# Altium PCB ArduinoUno_Motor_Shield.PcbDoc
Units mm, origin at the board's own origin, x right, y up, seen from the top; angles counter-clockwise.
Board outline 68.58 x 53.34 mm, 2 copper layers (Top Layer, Bottom Layer); 16 components, 38 nets, 79 pads, 0 vias.
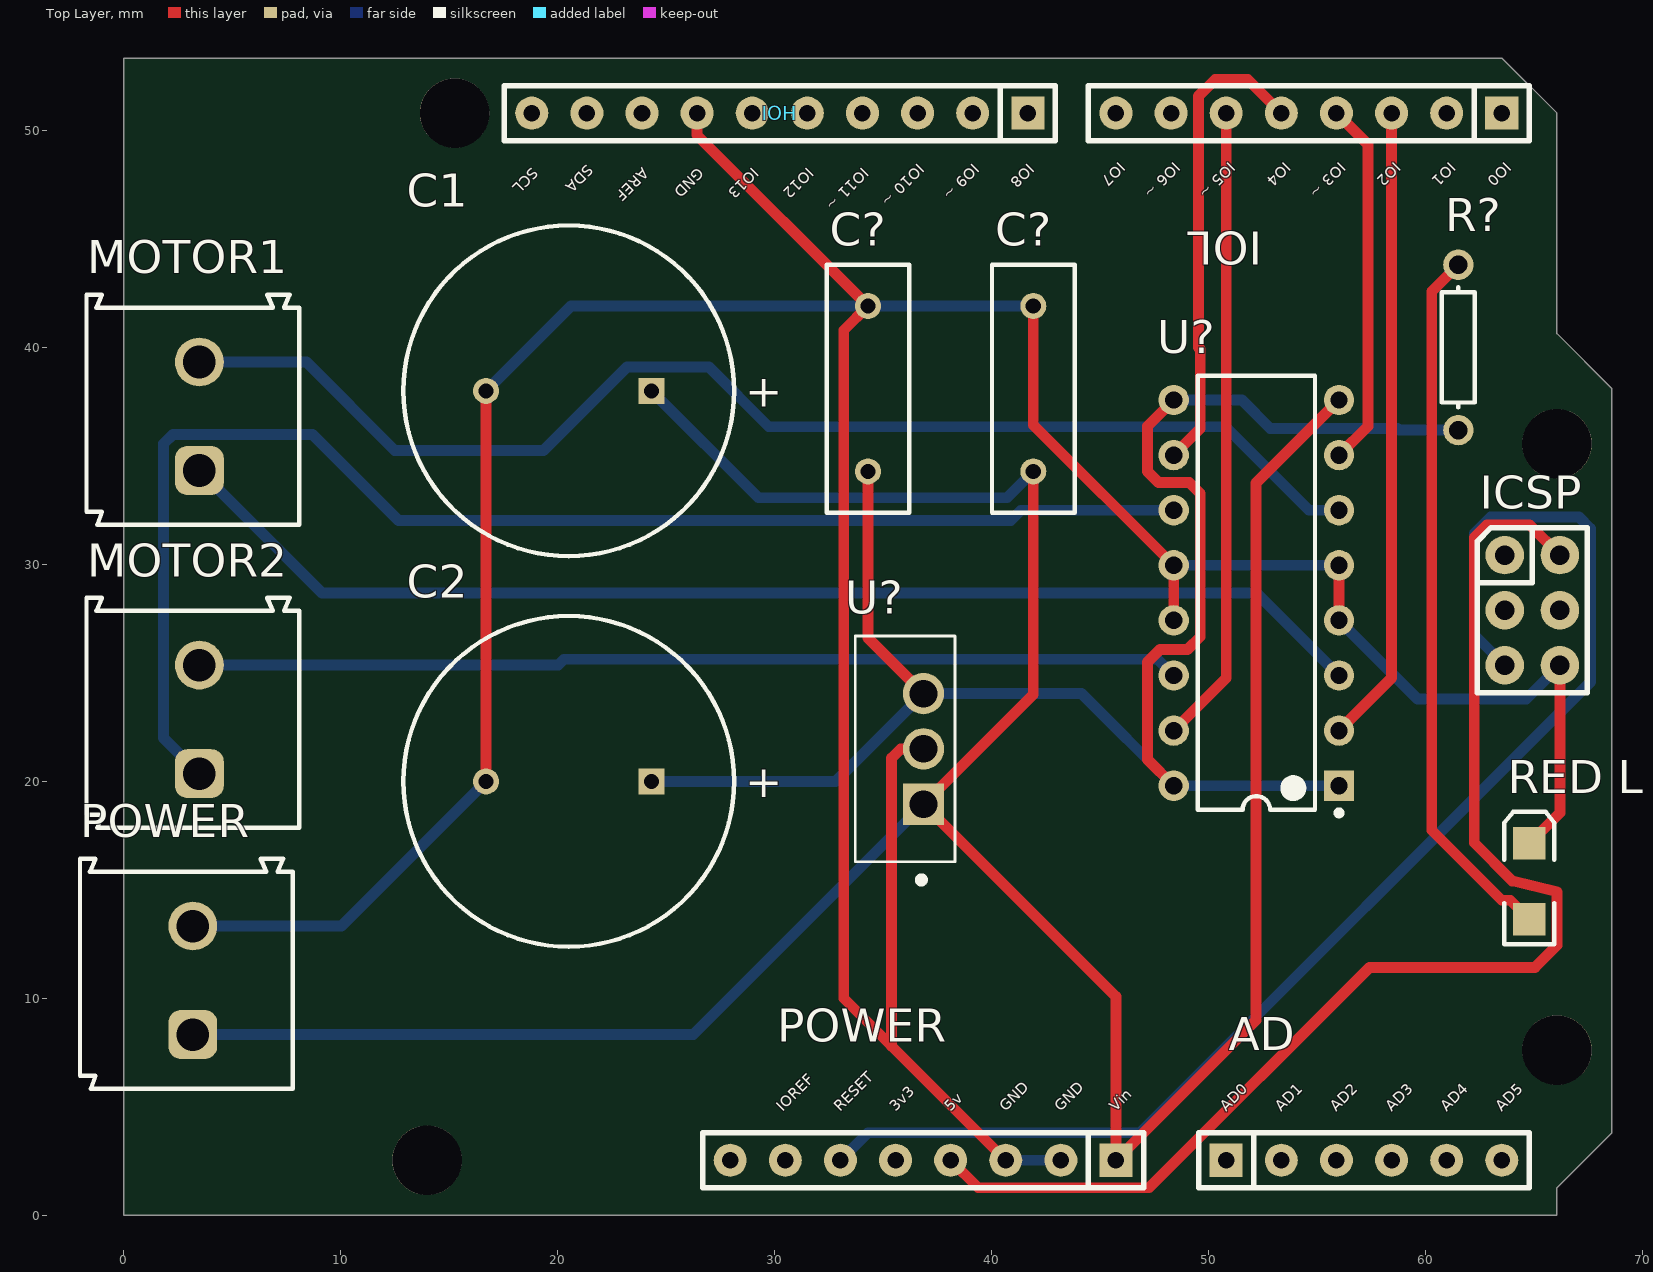
[diagram p0: Top Layer view]
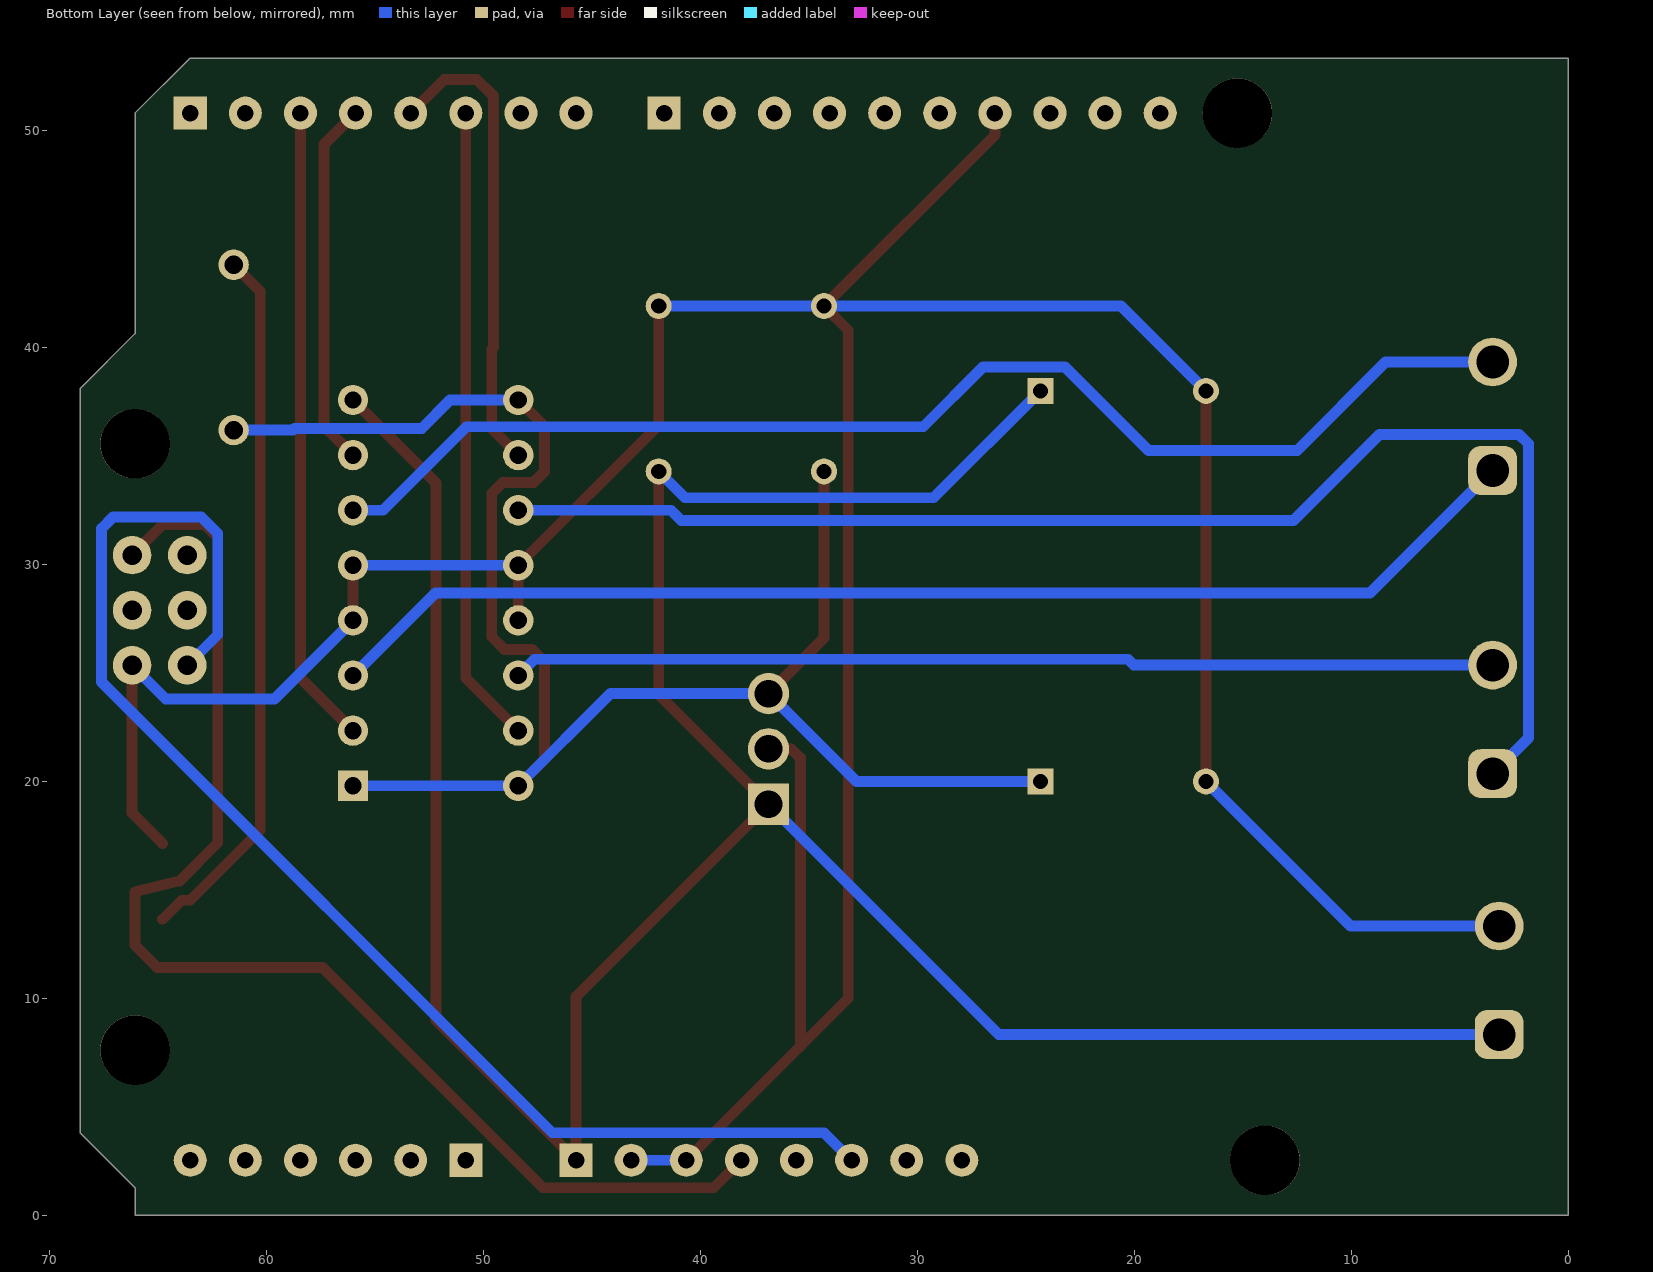
[diagram p1: Bottom Layer view, seen from below]
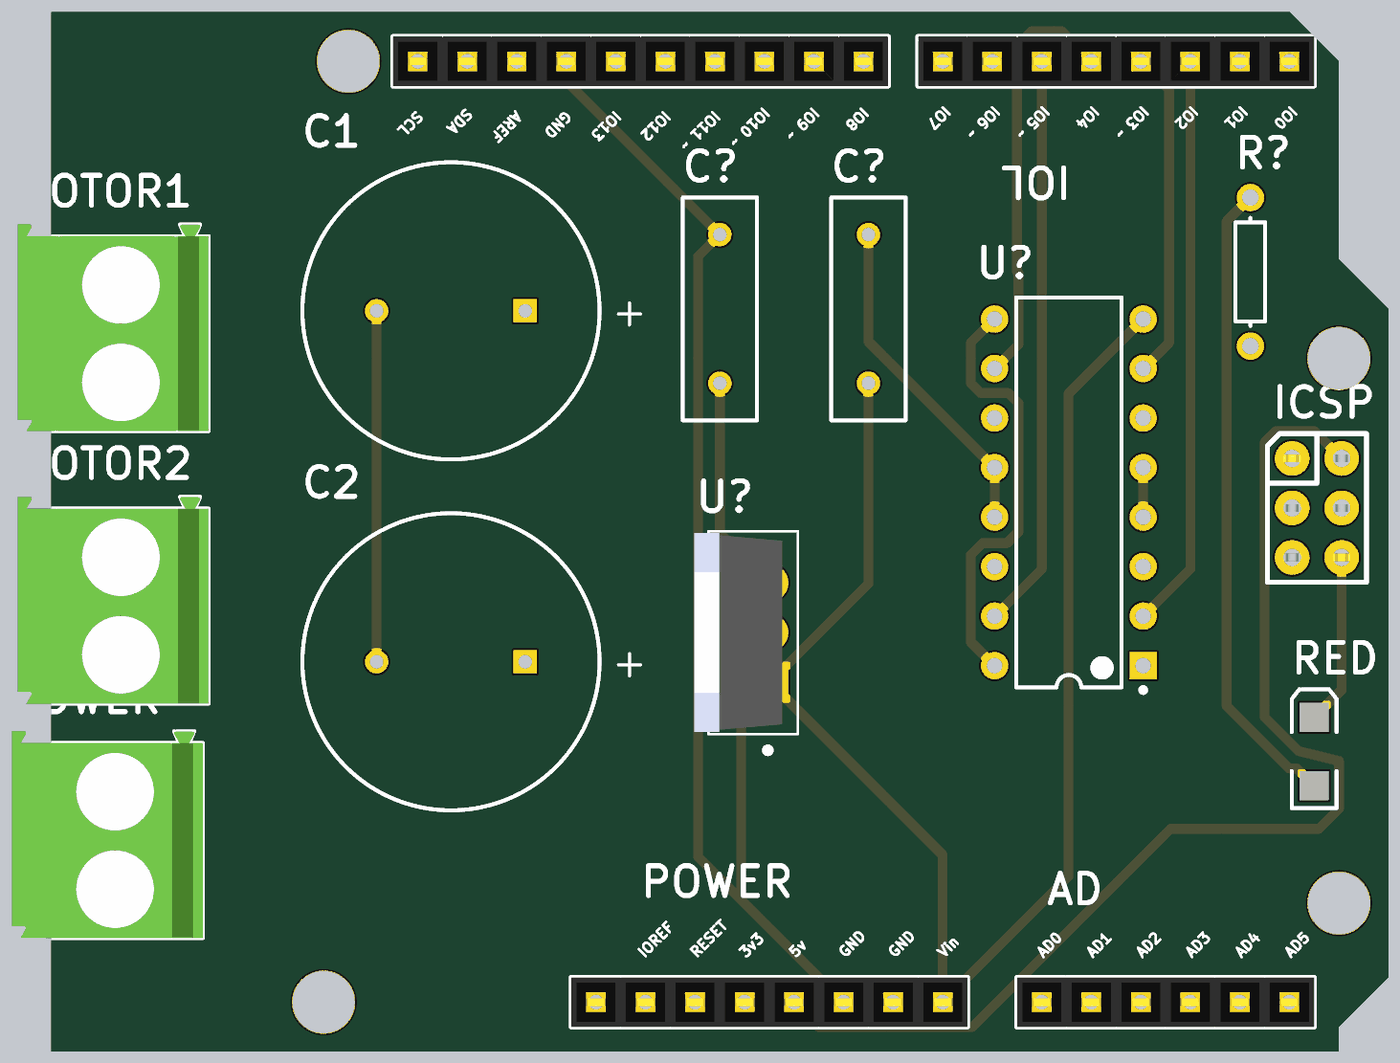
[diagram p2: 3D render of the assembled board from above, using the file's embedded part models]

## Layer stack, top to bottom
Top Solder: solder mask 0.0102, Solder Resist, Dk 3.5
Top Layer: signal copper 0.0356
Dielectric1: dielectric 0.32, FR-4, Dk 4.8
Bottom Layer: signal copper 0.0356
Bottom Solder: solder mask 0.0102, Solder Resist, Dk 3.5

## Board outline
0,0 0,53.34 63.5,53.34 66.04,50.8 66.04,40.64 68.58,38.1 68.58,3.81 66.04,1.27 66.04,0

## Design rules (kind name [scope] priority, off if disabled: settings)
Clearance [All] p1: gap=0.254 ignorepadtopadclearanceinfootprint=FALSE
PolygonConnect [All] p1: connectstyle=Relief reliefconductorwidth=0.254 reliefentries=4 polygonreliefangle="90 Angle" airgapwidth=0.254
RoutingVias [All] p1: holewidth=0.711 width=1.27 viastyle="Through Hole" minholewidth=0.711 minwidth=1.27 maxholewidth=0.711 maxwidth=1.27
SilkToSolderMaskClearance SilkscreenOverComponentPads [IsPad] p1: minsilkscreentomaskgap=0.254 clearancetoexposedcopper=TRUE
SolderMaskExpansion [All] p1: expansion=0.102 istentingtop=FALSE
SupplyNets "Schematic Supply Nets" [InNet('GND')] p1: voltage=0.000
Width [All] p1: maxlimit=10 minlimit=0.254 preferedwidth=0.5 minimp=50.000000 maximp=50.000000 favimp=50.000000
29 further rules are at their usual default settings.

## Classes and differential pairs
component class ArduinoUno_Motor_Shield: AD C1 C2 C? ICSP IOH IOL MOTOR1 MOTOR2 POWER R? "RED LED" U?

## Components (designator, comment, footprint, x,y, rotation, side; value= is the part's Value field where it differs from the comment)
AD "AD" "Header 6x1 8.5mm" 50.8,2.54 r0 top locked
C1 "" RB7.6-15 20.5,38 r0 top value=47uF
C2 "" RB7.6-15 20.5,20 r0 top value=47uF
C? "Cap" RAD-0.3 41.91,38.1 r90 top value=100nF
C? "Cap" RAD-0.3 34.29,38.1 r90 top value=100nF
ICSP "ICSP" ICSP 63.64,30.43 r0 top locked
IOH "IOH" "Header 10x1 8.5mm" 41.656,50.8 r180 top locked
IOL "IOL" "Header 8x1 8.5mm" 63.5,50.8 r180 top locked
MOTOR1 "691216710002" 691216710002 3.175,36.83 r90 top locked
MOTOR2 "691216710002" 691216710002 3.175,22.86 r90 top locked
POWER "691216710002" 691216710002 2.875,10.835 r90 top locked
POWER "POWER_UNO" "Header 8x1 8.5mm" 45.72,2.54 r180 top locked
R? "Res1" AXIAL-0.3 61.5,40 r90 top value=220
"RED LED" "LED2" 3.2X1.6X1.1 64.77,15.395 r90 top
U? "L293D" STM-L293D-16 52.19,28.69 r180 top
U? "L7805CV-DG" TO255P1040X460X2890-3 36,21.5 r90 top

## Footprints (in the part's own frame and the unit in brackets; to place one, negate y for a bottom-side part, rotate by r counter-clockwise, add the part's x,y. Pads: shape width x height; smd on the part's side, far side on the other; paste and mask are expansions set on the pad)
3.2X1.6X1.1 [mm] "SMT LED; 2 Flat Leads"
  rect 1.5x1.5 smd: 1(-1.75,0) 2(1.75,0)
  silkscreen extent -2.9,-1.15 3.2,1.15
691216710002 [mm] "Serie 2167 - 5.00 mm _ 2 pins"
  rrect50% 2.25x2.25 hole 1.5: 1(-2.5,-0.3)
  round 2.25 hole 1.5: 2(2.5,-0.3)
  silkscreen extent -5,-4.9 5.6,4.9, body extent -5,-4.9 5.6,4.9, height 13.85
AXIAL-0.3 [mm] "Axial Device, Thru-Hole; 2 Leads; 0.3 in Pin Spacing"
  round 1.4 hole 0.85: 1(-3.81,0) 2(3.81,0)
  silkscreen extent -2.77,-0.76 2.77,0.76
"Header 6x1 8.5mm" [mil] "Stackable 6 pin header"
  rect 60x60 hole 30: 1(0,0)
  round 60 hole 30: 2(100,0) 3(200,0) 4(300,0) 5(400,0) 6(500,0)
  silkscreen extent -50,-50 550,50, body extent -50,-50 550,50, height 335
"Header 8x1 8.5mm" [mil] "Stackable 8 pin header"
  rect 60x60 hole 30: 1(0,0)
  round 60 hole 30: 2(100,0) 3(200,0) 4(300,0) 5(400,0) 6(500,0) 7(600,0) 8(700,0)
  silkscreen extent -50,-50 750,50, body extent -50,-50 750,50, height 335
"Header 10x1 8.5mm" [mil] "Stackable 10 pin header"
  rect 60x60 hole 30: 1(0,0)
  round 60 hole 30: 2(100,0) 3(200,0) 4(300,0) 5(400,0) 6(500,0) 7(600,0) 8(700,0) 9(800,0) 10(900,0)
  silkscreen extent -50,-50 950,50, body extent -50,-50 950,50, height 335
ICSP [mil]
  round 70 hole 35.43: 1(0,0) 2(100,0) 3(0,-100) 4(100,-100) 5(0,-200) 6(100,-200)
  silkscreen extent -50,-250 150,50, body extent -50,-250 150,50, height 485
RAD-0.3 [mm] "Radial Cap, Thru-Hole; 2 Leads; 0.3 in Pin Spacing"
  round 1.2 hole 0.7: 1(-3.81,0) 2(3.81,0)
  silkscreen extent -5.71,-1.91 5.71,1.91
RB7.6-15 [mm] "Polarized Capacitor (Radial); 2 Leads"
  rect 1.2x1.2 hole 0.7: 1(3.81,0)
  round 1.2 hole 0.7: 2(-3.81,0)
  silkscreen extent -7.62,-7.62 7.62,7.62
STM-L293D-16 [mm] "DIP, 16-Leads, Body 20x6.85mm, Pitch 2.54mm"
  rect 1.4x1.4 hole 0.8: 1(-3.81,8.89)
  round 1.4 hole 0.8: 2(-3.81,6.35) 3(-3.81,3.81) 4(-3.81,1.27) 5(-3.81,-1.27) 6(-3.81,-3.81) 7(-3.81,-6.35) 8(-3.81,-8.89) 9(3.81,-8.89) 10(3.81,-6.35) 11(3.81,-3.81) 12(3.81,-1.27) 13(3.81,1.27) 14(3.81,3.81) 15(3.81,6.35) 16(3.81,8.89)
  silkscreen extent -3.94,-10 2.7,10.26, body extent -3.93,-10 3.93,10, height 5.1
TO255P1040X460X2890-3 [mm]
  rect 1.91x1.91 / inner round 1.91 / far side rect 1.91x1.91 hole 1.27: 1(-2.55,-0.85)
  round 1.91 hole 1.27: 2(0,-0.85) 3(2.55,-0.85)
  silkscreen extent -6.19,-2.3 5.2,2.3, body extent -5.1,-1.49 5.1,3.01, height 19.22

## Part data
AD: Supplier Part Number 1=2699089, Supplier 1=Arrow, Supplier 2=Digi-Key, Supplier 3=Arrow, Supplier 4=Arrow, Supplier Part Number 2=SAM1198-06-ND, Supplier Part Number 3=2699088, Supplier Part Number 4=2699075
C1 C2: library part "Cap Pol1", "Polarized Capacitor (Radial)", LatestRevisionDate=17-Jul-2002, LatestRevisionNote="Re-released for DXP Platform.", PackageDescription="Polarized Capacitor (Radial); 2 Leads", PackageReference=RB7.6-15, Published=8-Jun-2000, Publisher="Altium Limited"
C? C?: "Capacitor", LatestRevisionDate=17-Jul-2002, LatestRevisionNote="Re-released for DXP Platform.", PackageDescription="Radial Cap, Thru-Hole; 2 Leads; 0.3 in Pin Spacing", PackageReference=RAD-0.3, Published=8-Jun-2000, Publisher="Altium Limited"
ICSP: Supplier Part Number 1=2699117, Supplier 1=Arrow, Supplier 2=Arrow, Supplier 3=Digi-Key, Supplier 4=Arrow, Supplier 5=Digi-Key, Supplier Part Number 2=2699116, Supplier Part Number 3=SAM1185-06-ND, Supplier Part Number 4=2699091, Supplier Part Number 5=SAM1196-06-ND
IOH: Supplier Part Number 1=2698803S4475693N1004, Supplier 1=Arrow, Supplier 2=Digi-Key, Supplier 3=Arrow, Supplier Part Number 2=SAM1198-10-ND, Supplier Part Number 3=2698789
IOL POWER: Supplier Part Number 1=SAM1198-08-ND, Supplier 1=Digi-Key, Supplier 2=Arrow, Supplier 3=Arrow, Supplier 4=Arrow, Supplier Part Number 2=2698939, Supplier Part Number 3=2698940, Supplier Part Number 4=2698925
MOTOR1 MOTOR2 POWER: library part CMP-1502-02532-2, Current Rating=14A, Max Operating Temperature=120°C, Min Operating Temperature=-30°C, Voltage Rating=300V, Contact Material="Nickel, Tin", Height=13.9mm, Lead Pitch=5mm, NexarPartId=94172716, Number of Contacts=2, Number of Pins=2, Number of Rows=1, Packaging=Box, RoHS=Non-Compliant
R?: "Resistor", LatestRevisionDate=17-Jul-2002, LatestRevisionNote="Re-released for DXP Platform.", PackageDescription="Axial Device, Thru-Hole; 2 Leads; 0.3 in Pin Spacing", PackageReference=AXIAL-0.3, Published=8-Jun-2000, Publisher="Altium Limited"
"RED LED": "Typical RED, GREEN, YELLOW, AMBER GaAs LED", LatestRevisionDate=17-Jul-2002, LatestRevisionNote="Re-released for DXP Platform.", PackageDescription="SM LED; 2 Flat Leads", PackageReference=3.2X1.6X1.1, PackageVersion=Feb-2002, Published=8-Jun-2000, Publisher="Altium Limited"
U?: library part CMP-2000-06524-1, "Push-Pull Four Channel Driver with Diode, 4.5 to 36 V, -40 to 150 degC, 16-Pin PDIP, RoHS, Tube", Current - Output / Channel=600mA, Current - Peak Output=1.2A, Manufacturer=STMicroelectronics, On-State Resistance=-, Operating Temperature=-40°C~150°C, Package / Case="16-DIP(0.300\",7.62mm)", Package Description="16-Pin Thru-Hole Dual-In-Line, Body 20 x 6.85 mm, Pitch 2.54 mm", Package Reference=DIP-16, Standard Package=25, Supplier Device Package=16-PowerDIP, Voltage - Supply=4.5V~36V, Category=IntegratedCircuits(ICs), Datasheet URL=http://www.st.com/st-web-ui/static/active/en/resource/technical/document/datasheet/CD00000059.pdf, Datasheet Version=07/2003, Dynamic Catalog=HalfBridge, Family=PMIC-MOSFET,BridgeDrivers-InternalSwitch, Input Type=Non-Inverting, Manufacturer URL=http://www.st.com/, Mounting Technology=ThroughHole, Mounting Type=ThroughHole, Number of Outputs=4, Other Names=497-2936-5, Other Related Documents=L293DViewAllSpecifications, Packaging=Tube, PartNumber=L293D, Series=-, Type=HalfBridge
U?: "Linear Voltage Regulator IC Positive Fixed 1 Output 1.5A TO-220", Package="TO-220 STMicroelectronics", Check_prices=https://www.snapeda.com/parts/L7805CV-DG/STMicroelectronics/view-part/?ref=eda, MF=STMicroelectronics, MP=L7805CV-DG, SnapEDA_Link=https://www.snapeda.com/parts/L7805CV-DG/STMicroelectronics/view-part/?ref=snap

## Free pads (board coordinates)
  round 3.2 hole 3.2: 0(13.97,2.54) 0(15.24,50.8) 0(66.04,7.62) 0(66.04,35.56)

## Nets (pads, with @x,y where several pads share a name; then routed paths per layer and width w, separated by ;. In a path a pad name is that pad's centre, name@x,y a point inside that pad or via, vN(x,y) a via of type N, cw(c..) or ccw(c..) an arc to the next point about the centre after c; other vN are vias at no path point)
3V3: POWER.5
5V: ICSP.2 POWER.4 | length 59
  Top Layer w0.5: POWER.4 39.37,1.27 47.244,1.27 57.404,11.43 65.024,11.43 66.04,12.446 66.04,14.91 63.983,15.418 62.23,17.17 62.23,31.242 62.814,31.826 64.784,31.826 ICSP.2
AD0: AD.1
AD1: AD.2
AD2: AD.3
AD3: AD.4
AD4: AD.5
AD5: AD.6
AREF: IOH.8
GND: "RED LED.2" C1.2 C2.2 C?.2 ICSP.6 IOH.7 POWER.2 POWER.3 U?.2@36.85,21.5 U?.4 U?.5 U?.12 U?.13 | length 182.1
  Top Layer w0.5: C2.2 C1.2 ; IOH.7 26.416,49.784 34.29,41.91 33.172,40.792 33.172,10.008 35.382,7.798 ; U?.2@36.85,21.5 35.8,21.5 35.382,21.082 35.382,7.798 ; POWER.3 35.382,7.798 ; C?.2@41.91,41.91 41.91,36.43 U?.12 U?.13 ; U?.4 U?.5 ; 64.77,17.145 66.18,18.555 ICSP.6
  Bottom Layer w0.5: POWER.2@3.175,13.335 10.025,13.335 C2.2 ; C1.2 20.6,41.91 34.29,41.91 C?.2@41.91,41.91 ; POWER.3 POWER.2@43.18,2.54 ; U?.12 U?.5 ; U?.4 59.62,23.8 64.63,23.8 ICSP.6
IO0: IOL.1
IO1: IOL.2
IO2: IOL.3 U?.2@56,22.34 | length 29.5
  Top Layer w0.5: U?.2@56,22.34 58.42,24.76 IOL.3
IO3: IOL.4 U?.7 | length 16.9
  Top Layer w0.5: IOL.4 57.328,49.352 57.328,36.368 U?.7
IO4: IOL.5 U?.10 | length 21.9
  Top Layer w0.5: U?.10 49.606,36.266 49.606,39.929 49.53,40.005 49.53,51.587 50.292,52.349 51.791,52.349 IOL.5
IO5: IOL.6 U?.15 | length 29.5
  Top Layer w0.5: U?.15 50.8,24.76 IOL.6
IO6: IOL.7
IO7: IOL.8
IO8: IOH.1
IO9: IOH.2
IO10: IOH.3
IO11: IOH.4
IO12: IOH.5
IO13: IOH.6
IOREF: POWER.7
MISO: ICSP.1
MOSI: ICSP.4
NetC2_1: C2.1 C?.1@34.29,34.29 R?.1 U?.1@56,19.8 U?.3@36.85,24.05 U?.9 U?.16 | length 82.5
  Top Layer w0.5: C?.1@34.29,34.29 34.29,26.61 U?.3@36.85,24.05 ; U?.16 47.168,21.012 47.168,25.502 47.752,26.086 49.022,26.086 49.606,26.67 49.606,33.274 49.098,33.782 47.676,33.782 47.168,34.29 47.168,36.368 U?.9
  Bottom Layer w0.5: C2.1 32.8,20 36.85,24.05 44.13,24.05 U?.16 U?.1@56,19.8 ; U?.9 51.523,37.58 52.832,36.271 58.694,36.271 58.776,36.19 R?.1
NetMOTOR1_1: MOTOR1.1 U?.3@56,24.88 | length 56.4
  Bottom Layer w0.5: MOTOR1.1 9.128,28.677 52.203,28.677 U?.3@56,24.88
NetMOTOR1_2: MOTOR1.2 U?.6 | length 58.5
  Bottom Layer w0.5: MOTOR1.2 8.407,39.33 12.484,35.253 19.34,35.253 23.19,39.104 26.961,39.104 29.718,36.347 50.775,36.347 54.622,32.5 U?.6
NetMOTOR2_1: MOTOR2.1 U?.11 | length 64.4
  Bottom Layer w0.5: MOTOR2.1 1.829,22.006 1.829,35.56 2.261,35.992 8.687,35.992 12.649,32.029 40.869,32.029 41.339,32.5 U?.11
NetMOTOR2_2: MOTOR2.2 U?.14 | length 45.3
  Bottom Layer w0.5: MOTOR2.2 20.015,25.36 20.284,25.629 47.631,25.629 U?.14
NetR?_2: "RED LED.1" R?.2 | length 32.8
  Top Layer w0.5: R?.2 60.274,42.584 60.274,17.752 63.5,14.527 63.888,14.527 64.77,13.645
RESET: ICSP.5 POWER.6 | length 63.3
  Bottom Layer w0.5: POWER.6 34.29,3.81 46.812,3.81 67.589,24.587 67.589,31.648 67.056,32.182 62.992,32.182 62.23,31.42 62.23,26.76 ICSP.5
SCK: ICSP.3
SCL: IOH.10
SDA: IOH.9
VIN: C1.1 C?.1@41.91,34.29 POWER.1 U?.1@36.85,18.95 U?.8 | length 135
  Top Layer w0.5: C?.1@41.91,34.29 41.91,24.01 36.85,18.95 45.72,10.08 45.72,2.54 52.172,8.992 52.172,33.752 U?.8
  Bottom Layer w0.5: POWER.1@3.175,8.335 26.235,8.335 U?.1@36.85,18.95 ; C1.1 29.239,33.071 40.691,33.071 C?.1@41.91,34.29
pads on no net: POWER.8

## Silkscreen, mask and mechanical layers (free items; w line width, h text height)
Top Overlay:
  text "IO7" at 45.847,48.588 h0.51 r225
  text "IO6 ~" at 48.387,48.588 h0.51 r225
  text "IO5 ~" at 50.927,48.588 h0.51 r225
  text "IO4" at 53.467,48.588 h0.51 r225
  text "IO3 ~" at 56.007,48.588 h0.51 r225
  text "IO2" at 58.547,48.588 h0.51 r225
  text "IO1" at 61.087,48.588 h0.51 r225
  text "IO0" at 63.627,48.588 h0.51 r225
  text "IO10 ~" at 36.576,48.514 h0.51 r225
  text "IO9 ~" at 39.116,48.514 h0.51 r225
  text "IO8" at 41.656,48.514 h0.51 r225
  text "SDA" at 21.336,48.461 h0.51 r225
  text "SCL" at 18.796,48.334 h0.51 r225
  text "AREF" at 23.876,48.334 h0.51 r225
  text "GND" at 26.416,48.334 h0.51 r225
  text "IO13" at 28.956,48.334 h0.51 r225
  text "IO12" at 31.496,48.334 h0.51 r225
  text "IO11 ~" at 34.036,48.334 h0.51 r225
  text "IOREF" at 30.353,4.752 h0.51 r45
  text "RESET" at 33.02,4.752 h0.51 r45
  text "3v3" at 35.56,4.752 h0.51 r45
  text "5v" at 38.1,4.752 h0.51 r45
  text "GND" at 40.64,4.752 h0.51 r45
  text "GND" at 43.18,4.752 h0.51 r45
  text "Vin" at 45.72,4.752 h0.51 r45
  text "AD0" at 50.8,4.752 h0.51 r45
  text "AD1" at 53.34,4.752 h0.51 r45
  text "AD2" at 55.88,4.752 h0.51 r45
  text "AD3" at 58.42,4.752 h0.51 r45
  text "AD4" at 60.96,4.752 h0.51 r45
  text "AD5" at 63.5,4.752 h0.51 r45
  text "RESET" at 32.893,-63.881 h0.51 r45
  text "3v3" at 35.433,-63.881 h0.51 r45
  text "5v" at 37.973,-63.881 h0.51 r45
  text "GND" at 40.513,-63.881 h0.51 r45
  text "GND" at 43.053,-63.881 h0.51 r45
  text "Vin" at 45.593,-63.881 h0.51 r45
Mechanical 1:
  circle w0.127: c15.24,50.8 r1.6
  circle w0.127: c66.04,7.62 r1.6
  circle w0.127: c13.97,2.54 r1.6
  circle w0.127: c66.04,35.56 r1.6
  lines w0.127: 0,0 0,53.34 63.5,53.34 66.04,50.8 66.04,40.64 68.58,38.1 68.58,3.81 66.04,1.27 66.04,0 0,0

## Text inside footprints (layer, text, board x,y; h text height)
C1: Top Overlay "+" at 28.632,37.263 h1.5
C2: Top Overlay "+" at 28.632,19.263 h1.5